# EAGLE board Aegis Protocol (EAGLE 9.7.0)

Size 220.41 x 230.85 mm. Coordinates in mm from the lower left corner, seen from the top.
Outline: 0,0 220.41,0 220.41,230.85 0,230.85 0,0
Copper layers (1*16): Top 0.035mm / dielectric 1.5mm / Bottom 0.035mm
Design rules "default": minimum track width 6mil, minimum drill 0.35mm, track to track 6mil, track to pad 6mil, pad to pad 6mil, via to via 6mil, smd to smd 6mil, copper to edge 40mil, drill to drill 6mil, minimum pad ring 10mil, minimum via ring 8mil, stop-mask expansion 4mil, vias tented up to drill 0mil, thermal gap 10mil

## Footprints (pad centres in the part's own frame; a part is rotated, then mirrored left to right if it is on the bottom)
LED-RGB-5MM = drill 0.9: B 0.635,0.635; C -0.635,-0.635; G 1.905,-0.635; R -1.905,0.635
1X08 = drill 1.016 long: 1 -8.89,0; 2 -6.35,0; 3 -3.81,0; 4 -1.27,0; 5 1.27,0; 6 3.81,0; 7 6.35,0; 8 8.89,0
PIEZO = drill 1 pad 1.6: 1 -3.5,0; 2 3.5,0
28027 = drill 1.016 long: 1 -2.54,0; 2 0,0; 3 2.54,0
RESAD1016W63L850D250B = drill 0.83 pad 1.43: 1 -5.08,0; 2 5.08,0
HA-06-SM065 = drill 1 pad 1.676: 1 -2.54,-2.54; 2 0,2.54; 3 2.54,-2.54
SG90 = drill 1.016 long: 1 -2.54,0; 2 0,0; 3 2.54,0
ARDUINO-UNO-R3-SHIELD = drill 1.016 pad 1.88: 3.3V 24.13,-2.54; 5V 24.13,0; A0 24.13,12.7; A1 24.13,15.24; A2 24.13,17.78; A3 24.13,20.32; A4 24.13,22.86; A5 24.13,25.4; AREF -24.13,-13.97; D2 -24.13,20.32; D3 -24.13,17.78; D4 -24.13,15.24; D5 -24.13,12.7; D6 -24.13,10.16; D7 -24.13,7.62; D8 -24.13,3.81; D9 -24.13,1.27; D10 -24.13,-1.27; D11 -24.13,-3.81; D12 -24.13,-6.35; D13 -24.13,-8.89; GND@0 24.13,2.54; GND@1 24.13,5.08; GND@2 -24.13,-11.43; IOREF 24.13,-7.62; NC 24.13,-10.16; RES 24.13,-5.08; RX -24.13,25.4; SCL -24.13,-19.05; SDA -24.13,-16.51; TX -24.13,22.86; VIN 24.13,7.62
LCD-I2C = drill 1.016 long: 1 -19.05,-5.08; 2 -19.05,-7.62; 3 -19.05,-10.16; 4 -19.05,-12.7

## Placement (x,y rotation side)
D1  LED-RGBRCBG-PTH  [LED-RGB-5MM]  144.21,139.8 0 top
KEYPAD1  KEYPAD-4X4  [1X08]  42.93,86.01 0 top
PIEZO1  PIEZO  [PIEZO]  174.92,127.21 0 top
PIR1  PIR-SENSOR_28027  [28027]  214.06,163.45 270 top
R1  220  [RESAD1016W63L850D250B]  140.4,134.72 90 top
R2  220  [RESAD1016W63L850D250B]  142.94,134.72 90 top
R3  220  [RESAD1016W63L850D250B]  145.48,134.72 90 top
R4  220  [RESAD1016W63L850D250B]  148.02,134.72 90 top
RPOT1  250k  [HA-06-SM065]  206.36,127.65 0 top
SERVO1  SERVOSG90  [SG90]  157.98,155.74 180 top
U1  ARDUINO-UNO-R3-SHIELD  [ARDUINO-UNO-R3-SHIELD]  53.9,29.84 270 top
U2  LCD-16X2-I2CSUNFOUNDER-IIC  [LCD-I2C]  30.73,223.31 0 top
U3  ARDUINO-UNO-R3-SHIELD  [ARDUINO-UNO-R3-SHIELD]  185.77,29.88 270 top

## Library data of the parts
D1 KEYPAD1 PIEZO1 PIR1 R1-R4 RPOT1 SERVO1 U1-U3 = Tinkercad

## Nets
D1_B: D1.B R3.2
D1_C: D1.C R2.2
D1_G: D1.G R4.2
D1_R: D1.R R1.2
U1_5V: U1.5V U2.2
U1_A4: U1.A4 U2.3 U3.A4
U1_A5: U1.A5 U2.4 U3.A5
U1_D2: KEYPAD1.1 U1.D2
U1_D3: KEYPAD1.2 U1.D3
U1_D4: KEYPAD1.3 U1.D4
U1_D5: KEYPAD1.4 U1.D5
U1_D6: KEYPAD1.5 U1.D6
U1_D7: KEYPAD1.6 U1.D7
U1_D8: KEYPAD1.7 U1.D8
U1_D9: KEYPAD1.8 U1.D9
U1_GND: PIEZO1.2 PIR1.3 R2.1 RPOT1.1 SERVO1.1 U1.GND@0 U1.GND@1 U1.GND@2 U2.1 U3.GND@0 U3.GND@1 U3.GND@2
U3_5V: PIR1.2 RPOT1.3 SERVO1.2 U3.5V
U3_A0: RPOT1.2 U3.A0
U3_D2: PIR1.1 U3.D2
U3_D3: PIEZO1.1 U3.D3
U3_D4: R1.1 U3.D4
U3_D5: R3.1 U3.D5
U3_D6: R4.1 U3.D6
U3_D10: SERVO1.3 U3.D10

## Tracks (layer width: path | path; a pad name or v marks a point on that pad's centre or on a via)
D1_B  (1 unrouted)
D1_C  (1 unrouted)
D1_G  (1 unrouted)
D1_R  (1 unrouted)
U1_5V  (1 unrouted)
U1_A4  (2 unrouted)
U1_A5  (2 unrouted)
U1_D2  (1 unrouted)
U1_D3  (1 unrouted)
U1_D4  (1 unrouted)
U1_D5  (1 unrouted)
U1_D6  (1 unrouted)
U1_D7  (1 unrouted)
U1_D8  (1 unrouted)
U1_D9  (1 unrouted)
U1_GND  (11 unrouted)
U3_5V  (3 unrouted)
U3_A0  (1 unrouted)
U3_D2  (1 unrouted)
U3_D3  (1 unrouted)
U3_D4  (1 unrouted)
U3_D5  (1 unrouted)
U3_D6  (1 unrouted)
U3_D10  (1 unrouted)